# Altium PCB AirSensor.PcbDoc
Units mm, origin at the board's own origin, x right, y up, seen from the top; angles counter-clockwise.
Board outline 50 x 31 mm, 2 copper layers (Top Layer, Bottom Layer); 39 components, 28 nets, 136 pads, 4 vias.
Unrouted connection lines stored in the file: 85.
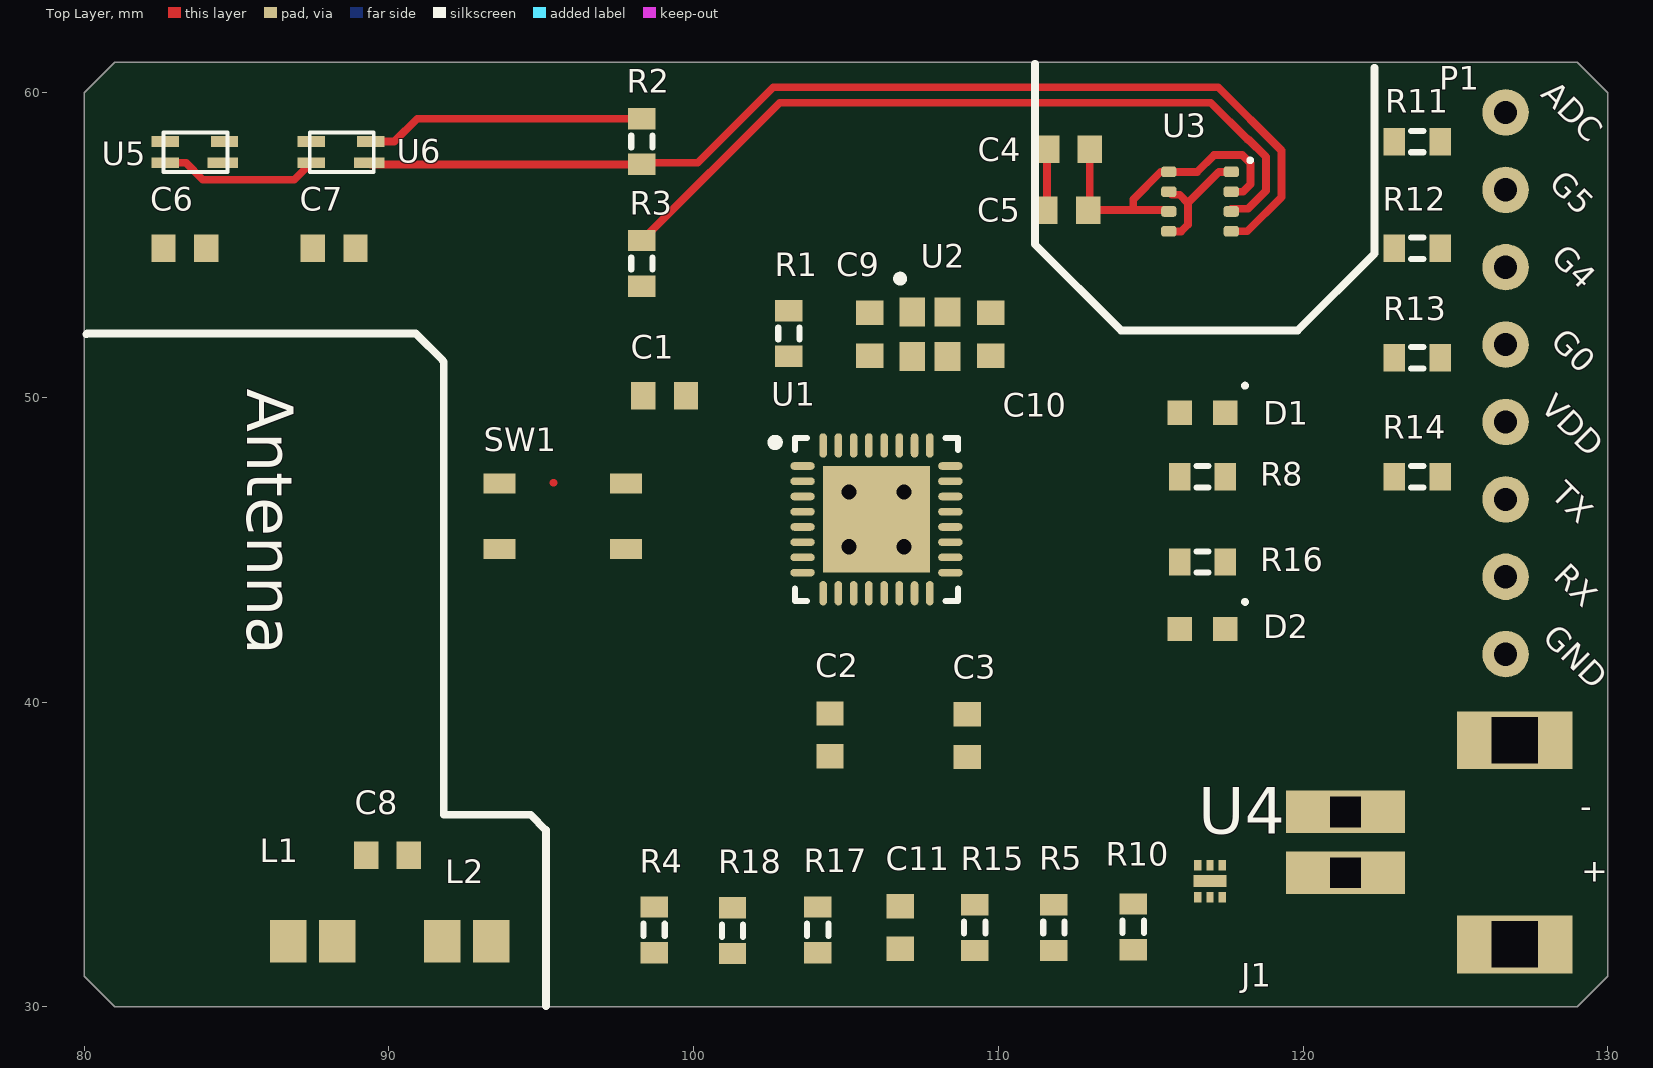
[diagram p0: Top Layer view]
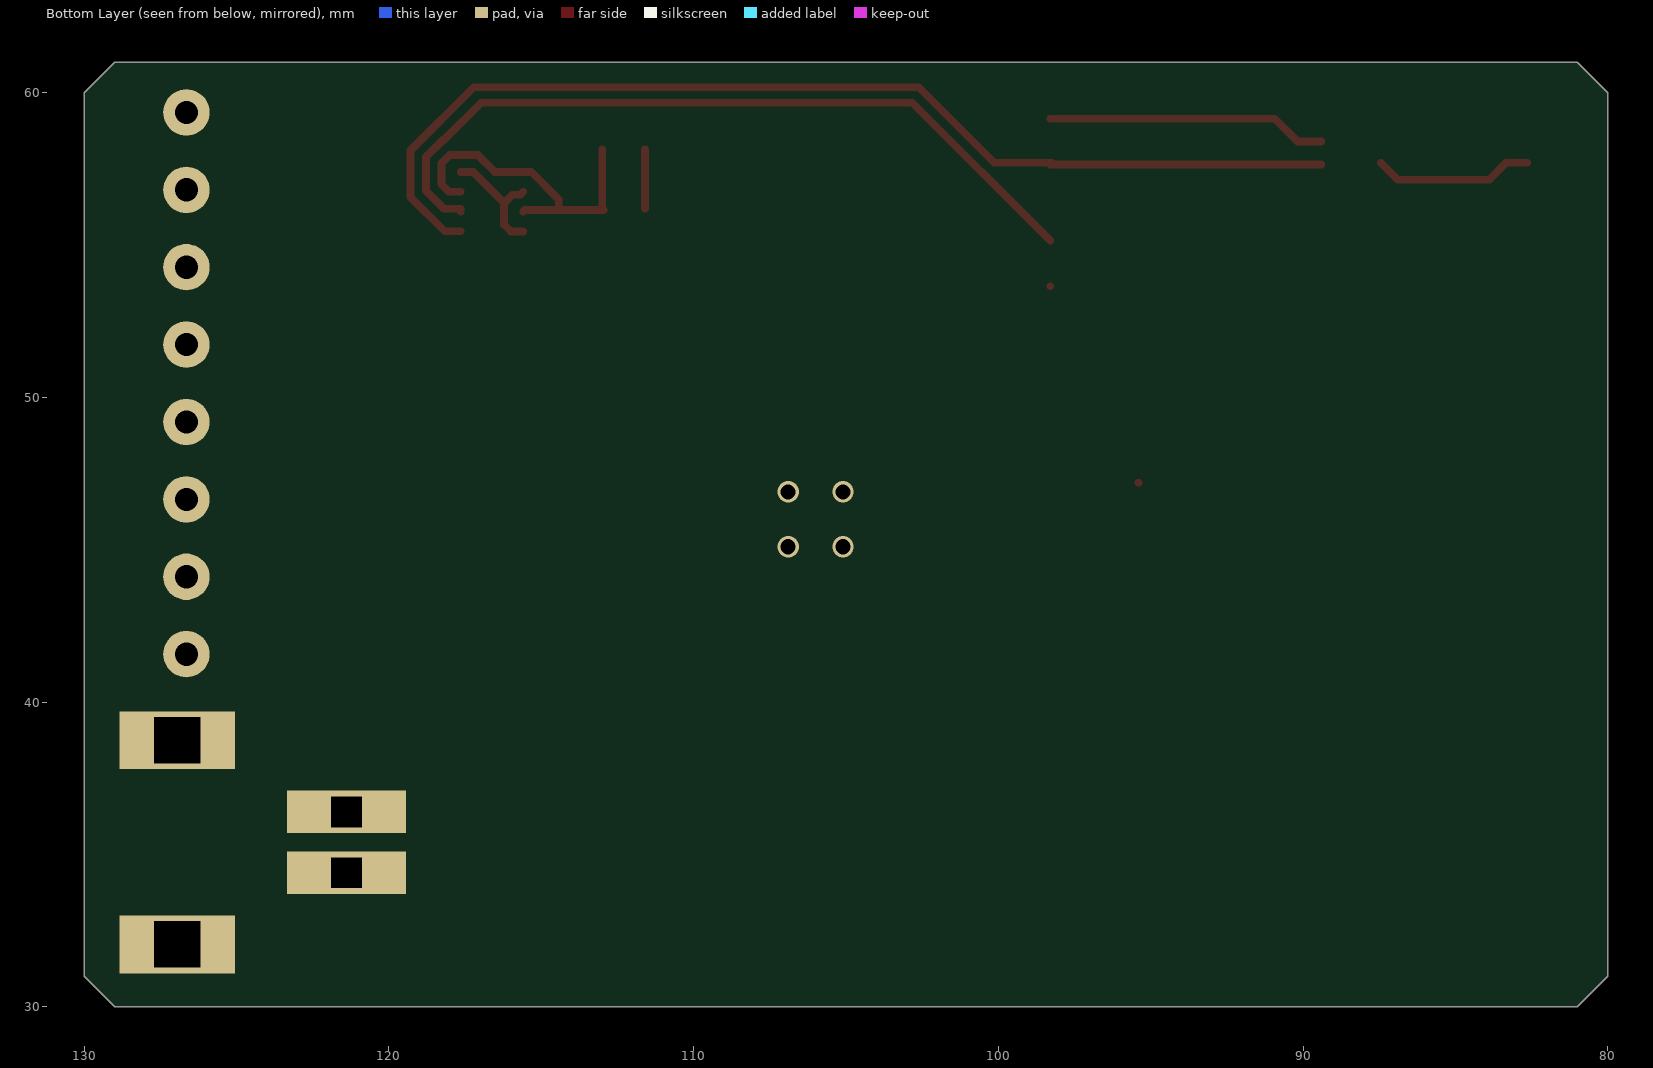
[diagram p1: Bottom Layer view, seen from below]

## Layer stack, top to bottom
Top Solder: solder mask 0.0102, Solder Resist, Dk 3.5
Top Layer: signal copper 0.0356
Dielectric 1: dielectric 0.32, FR-4, Dk 4.8
Bottom Layer: signal copper 0.0356
Bottom Solder: solder mask 0.0102, Solder Resist, Dk 3.5

## Board outline
80,31 81,30 129,30 130,31 130,60 129,61 81,61 80,60

## Design rules (kind name [scope] priority, off if disabled: settings)
Clearance [All] p1: gap=0.25
HoleSize [All] p1: absolutevalues=TRUE maxlimit=2.54 minlimit=0.3 maxpercent=80.000 minpercent=20.000
PolygonConnect [All] p1: connectstyle=Relief reliefconductorwidth=0.254 reliefentries=4 polygonreliefangle="90 Angle" airgapwidth=0.254
RoutingVias [All] p1: holewidth=0.7 width=1.03 viastyle="Through Hole" minholewidth=0.7 minwidth=1.03 maxholewidth=0.7 maxwidth=1.03
SolderMaskExpansion [All] p1: expansion=0.102
Width [All] p1: maxlimit=0.508 minlimit=0.254 preferedwidth=0.254
29 further rules are at their usual default settings.

## Components (designator, comment, footprint, x,y, rotation, side; value= is the part's Value field where it differs from the comment)
C1 "" 1608[0603] 99.05,50.05 r0 top
C2 "Cap Semi" 1608[0603] 104.475,38.925 r90 top
C3 "Cap Semi" 1608[0603] 108.975,38.9 r270 top
C4 "" 1608[0603] 112.3,58.15 r0 top
C5 "" 1608[0603] 112.25,56.15 r0 top
C6 "" 1608[0603] 83.3,54.9 r0 top
C7 "" 1608[0603] 88.2,54.9 r0 top
C8 "Cap Semi" 1608[0603] 89.95,34.975 r0 top
C9 "Cap Semi" 1608[0603] 105.775,52.075 r90 top
C10 "Cap Semi" 1608[0603] 109.75,52.075 r90 top
C11 "Cap Semi" 1608[0603] 106.775,32.6 r90 top
D1 "LED" LED0603 116.7,49.5 r0 top
D2 "LED" LED0603 116.7,42.4 r0 top
J1 "JST-PH2" JST-PH2 121.4,34.4 r90 top
L1 "Inductor" 2029 87.5,32.15 r0 top
L2 "Inductor" 2029 92.55,32.15 r180 top
P1 "8 Pin Header" Header8 126.65,41.575 r90 top
R1 "" J1-0603 103.125,52.1 r90 top
R2 "Res3" J1-0603 98.3,58.4 r270 top
R3 "Res3" J1-0603 98.3,54.4 r90 top
R4 "Res3" J1-0603 98.7,32.525 r90 top
R5 "Res3" J1-0603 111.825,32.6 r90 top
R8 "Res3" J1-0603 116.7,47.4 r0 top
R10 "Res3" J1-0603 114.425,32.625 r90 top
R11 "Res3" J1-0603 123.75,58.4 r180 top
R12 "Res3" J1-0603 123.75,54.9 r0 top
R13 "Res3" J1-0603 123.75,51.3 r180 top
R14 "Res3" J1-0603 123.75,47.4 r180 top
R15 "Res3" J1-0603 109.225,32.6 r90 top
R16 "Res3" J1-0603 116.7,44.6 r180 top
R17 "Res3" J1-0603 104.075,32.525 r90 top
R18 "Res3" J1-0603 101.275,32.5 r90 top
SW1 "PTS810" PTS810 95.7,46.1 r0 top
U1 "ESP8285" QFN50P500X500X80_HS-33N 106,46 r0 top
U2 "FA-128" DFN95P200X50-4N 107.175,52.8 r270 top
U3 "BME280" BME280 115.595,57.404 r0 top
U4 "NCP176BMX330TCG" NCP176BMX330TCG 116.95,34.125 r0 top
U5 "VEML60xx" VEML60xx 82.6,58.4 r0 top
U6 "VEML60xx" VEML60xx 87.4,58.4 r0 top

## Footprints (in the part's own frame and the unit in brackets; to place one, negate y for a bottom-side part, rotate by r counter-clockwise, add the part's x,y. Pads: shape width x height; smd on the part's side, far side on the other; paste and mask are expansions set on the pad)
1608[0603] [mm] "Chip Capacitor, Body 1.6x0.8mm, IPC High Density"
  rect 0.8x0.9 smd: 1(-0.7,0) 2(0.7,0)
  body extent -0.87,-0.48 0.87,0.48, height 1.3
2029 [mm] "Chip Inductor, Body 2.0x1.2mm, IPC High Density"
  rect 1.2x1.4 smd: 1(-0.8,0) 2(0.8,0)
  body extent -1.1,-0.7 1.1,0.7, height 0.55
BME280 [mm]
  rrect50% 0.5x0.35 smd: 1(2.05,0) 2(2.05,-0.65) 3(2.05,-1.3) 4(2.05,-1.95) 5(0,-1.95) 6(0,-1.3) 7(0,-0.65) 8(0,0)
  silkscreen extent 2.6,0.32 2.73,0.44, body extent -0.35,-2.23 2.4,0.28, height 0.93
DFN95P200X50-4N [mm] "DFN, 4-Leads, Body 1.60x2.00mm, Pitch 0.95mm, IPC Medium Density"
  rect 0.95x0.85 smd: 1(0,0) 2(1.45,0) 3(1.45,1.15) 4(0,1.15)
  silkscreen extent -1.2,-0.5 -1,-0.3, body extent -0.58,-0.53 2.03,1.68, height 0.5
Header8 [mil]
  round 60 hole 30: 1(0,0) 2(100,0) 3(200,0) 4(300,0) 5(400,0) 6(500,0) 7(600,0) 8(700,0)
  body extent -34,-34 734,34, height 169
J1-0603 [mm] "Chip Resistor, Body 1.6x0.8mm, IPC High Density"
  rect 0.7x0.9 smd: 1(-0.75,0) 2(0.75,0)
  silkscreen extent -0.2,-0.35 0.2,0.35, body extent -0.85,-0.48 0.85,0.48, height 0.9
JST-PH2 [mm]
  rect 1.4x3.9 hole 1 square: 1(2,0) 2(0,0)
  rect 1.9x3.8 hole 1.5 square: ""(-2.35,-5.55) ""(4.35,-5.55)
  body extent -3.2,-7.35 5.2,1.85, height 5.5
LED0603 [mm]
  rect 0.8x0.8 smd: 1(-0.75,0) 2(0.75,0)
  silkscreen extent 1.33,0.83 1.46,0.95, body extent -1.25,-0.5 1.25,0.5, height 0.4
NCP176BMX330TCG [mm]
  rect 0.24x0.35 smd: 1(-0.4,-0.525) 2(0,-0.525) 3(0.4,-0.525) 4(0.4,0.525) 5(0,0.525) 6(-0.4,0.525)
  rect 1.08x0.4 smd: ""(0,0)
  body extent -0.61,-0.77 0.61,0.77, height 0.38
PTS810 [mm]
  rect 1.05x0.65 smd: 1(-2.075,1.075) 2(2.075,1.075) 3(-2.075,-1.075) 4(2.075,-1.075)
  body extent -2.7,-1.5 2.7,1.5, height 2.5
QFN50P500X500X80_HS-33N [mm] "QFN, 32-Leads, Body 5.00x5.00mm, Pitch 0.50mm, Thermal Pad 3.70x3.70mm, IPC Medium Density"
  oval 0.8x0.25 smd: 1(-2.425,1.75) 2(-2.425,1.25) 3(-2.425,0.75) 4(-2.425,0.25) 5(-2.425,-0.25) 6(-2.425,-0.75) 7(-2.425,-1.25) 8(-2.425,-1.75) 17(2.425,-1.75) 18(2.425,-1.25) 19(2.425,-0.75) 20(2.425,-0.25) 21(2.425,0.25) 22(2.425,0.75) 23(2.425,1.25) 24(2.425,1.75)
  oval 0.25x0.8 smd: 9(-1.75,-2.425) 10(-1.25,-2.425) 11(-0.75,-2.425) 12(-0.25,-2.425) 13(0.25,-2.425) 14(0.75,-2.425) 15(1.25,-2.425) 16(1.75,-2.425) 25(1.75,2.425) 26(1.25,2.425) 27(0.75,2.425) 28(0.25,2.425) 29(-0.25,2.425) 30(-0.75,2.425) 31(-1.25,2.425) 32(-1.75,2.425)
  rect 3.5x3.5 smd: 33(0,0)
  silkscreen extent -3.45,-2.68 2.68,2.67, body extent -2.52,-2.53 2.53,2.52, height 0.8
VEML60xx [mm]
  rect 0.9x0.35 smd: 1(0.05,0) 2(0.05,-0.7) 4(2,0)
  rect 1x0.35 smd: 3(1.95,-0.7)
  silkscreen extent 0,-1 2.1,0.3, body extent 0,-1 2.1,0.3, height 1

## Part data
C1 C4 C5 C6 C7: library part "Cap Semi", "Capacitor (Semiconductor SIM Model)"
C2 C3 C8 C9 C10 C11: "Capacitor (Semiconductor SIM Model)"
D1 D2: library part LED3, "Typical BLUE SiC LED"
P1: library part Header8
R1: library part Res3, "Resistor"
R2 R3 R4 R5 R8 R10 R11 R12 R13 R14 R15 R16 R17 R18: "Resistor"
U1: "ESP8285 Wifi enabled microcontroller"
U2: library part FA128, "FA-128 26.0000MF10Z-W3"
U3: "BME280 Temp., hum., press. sensor"

## Via types
v1: diameter 0.7, hole 0.5, Top Layer to Bottom Layer, 4 vias

## Nets (pads, with @x,y where several pads share a name; then routed paths per layer and width w, separated by ;. In a path a pad name is that pad's centre, name@x,y a point inside that pad or via, vN(x,y) a via of type N, cw(c..) or ccw(c..) an arc to the next point about the centre after c; other vN are vias at no path point)
ADC: C11.2 R17.1 R18.2 U1.6
ADC_OUT: P1.8 R17.2
ANT: C8.2 L2.2 U1.2
GND: C1.1 C2.1 C3.2 C4.1 C5.1 C6.1 C7.1 C9.1 C10.2 D1.2 D2.2 J1.1 L1.1 L2.1 P1.1 R1.2 R4.1 R10.1 R18.1 SW1.3 SW1.4 U1.33 U2.2 U2.4 U3.1 U3.5 U3.7 U4.3 U5.1 U6.1 | length 6
  Top Layer w0.254: C5.1@111.6,56.2 C4.1 ; U3.5 115.599,55.45 116,55.45 116.222,55.672 116.222,56.384 ; U3.7 115.693,56.656 115.95,56.656 116.222,56.384 ; U3.1 117.242,57.404 116.222,56.384
  other v1: 105.1,45.1 106.9,45.1 105.1,46.9 106.9,46.9
GPIO0: U1.15
GPIO0_OUT: P1.5 R12.2
GPIO4_OUT: P1.6 R13.2
GPIO5_OUT: P1.7 R14.2
LED1: R8.2 U1.10
LED2: R16.2 U1.12
MTDO: R10.2 U1.13
NetC8_1: C8.1 L1.2
NetD1_1: D1.1 R8.1
NetD2_1: D2.1 R16.1
NetR1_1: R1.1 U1.31
NetR11_1: R11.1 R12.1
NetR13_1: R13.1 U1.16
NetR14_1: R14.1 U1.24
NetR15_2: R15.2 U1.7
RST: R4.2 R5.1 SW1.1 SW1.2 U1.8 U1.32
RX: P1.2 U1.25
SCL: R2.2 U1.9 U3.4 U5.3 U6.3 | length 35.5
  Top Layer w0.254: U6.3@89.4,57.65 R2.2 98.25,57.7 100.132,57.7 102.615,60.183 117.216,60.183 119.292,58.106 119.292,56.577 118.169,55.454 U3.4
SDA: R3.2 U1.14 U3.3 U5.2 U6.2 | length 30.9
  Top Layer w0.254: U5.2 83.336,57.7 83.892,57.144 86.894,57.144 U6.2 ; R3.2 102.825,59.675 116.975,59.675 118.182,58.468 118.212,58.468 118.784,57.896 118.784,56.788 118.195,56.198 117.645,56.198 U3.3
TX: P1.3 U1.26
VDD33: C1.2 C2.2 C3.1 C4.2 C5.2 C6.2 C7.2 P1.4 R2.1 R3.1 R5.2 R11.2 R15.1 U1.1 U1.3 U1.4 U1.11 U1.17 U1.29 U1.30 U3.2 U3.6 U3.8 U4.1 U4.2 U5.4 U6.4 | length 20.2
  Top Layer w0.254: U6.4 90.175,58.4 90.925,59.15 R2.1 ; C5.2 114.425,56.15 ; C5.2@113,56.2 C4.2 ; U3.6 115.549,56.15 114.425,56.15 ; U3.2 118.032,56.754 118.276,56.998 118.276,57.686 118.002,57.96 117.082,57.96 116.526,57.404 U3.8 115.333,57.404 114.425,56.496 114.425,56.15
VIN: J1.2 U4.4 U4.6
XTAL_IN: C9.2 U1.28 U2.1
XTAL_OUT: C10.1 U1.27 U2.3
pads on no net: C11.1 J1. U1.5 U1.18 U1.19 U1.20 U1.21 U1.22 U1.23 U4. U4.5

## Silkscreen, mask and mechanical layers (free items; w line width, h text height)
Top Overlay:
  lines w0.254: 80.075,52.075 80.1,52.1 90.8,52.1 90.875,52.1 91.775,51.2 ; 91.8,51.175 91.8,36.3 94.65,36.3 95.15,35.8 95.15,30.025 ; 111.2,60.95 111.2,55.025 114.025,52.2 119.825,52.2 122.35,54.725 122.35,60.825
  text "ADC" at 127.775,59.925 h0.76 r315
  text "G5" at 128.025,56.975 h0.76 r315
  text "G4" at 128.1,54.55 h0.76 r315
  text "G0" at 128.075,51.8 h0.76 r315
  text "Antenna" at 85.344,50.292 h1.52 r270
  text "VDD" at 127.75,49.65 h0.76 r315
  text "TX" at 128.1,46.775 h0.76 r315
  text "RX" at 128.175,44.075 h0.76 r315
  text "GND" at 127.825,42.075 h0.76 r315
  text "-" at 129.1,36.2 h0.76
  text "+" at 129.125,34.1 h0.76